# Altium PCB PCB1.PcbDoc (part 5 of 8)
Units mil, origin at the board's own origin, x right, y up, seen from the top; angles counter-clockwise.
Board outline 6000 x 4000 mil, 2 copper layers (Top Layer, Bottom Layer); 1253 components, 565 nets, 6549 pads, 0 vias.
Unrouted connection lines stored in the file: 1925.
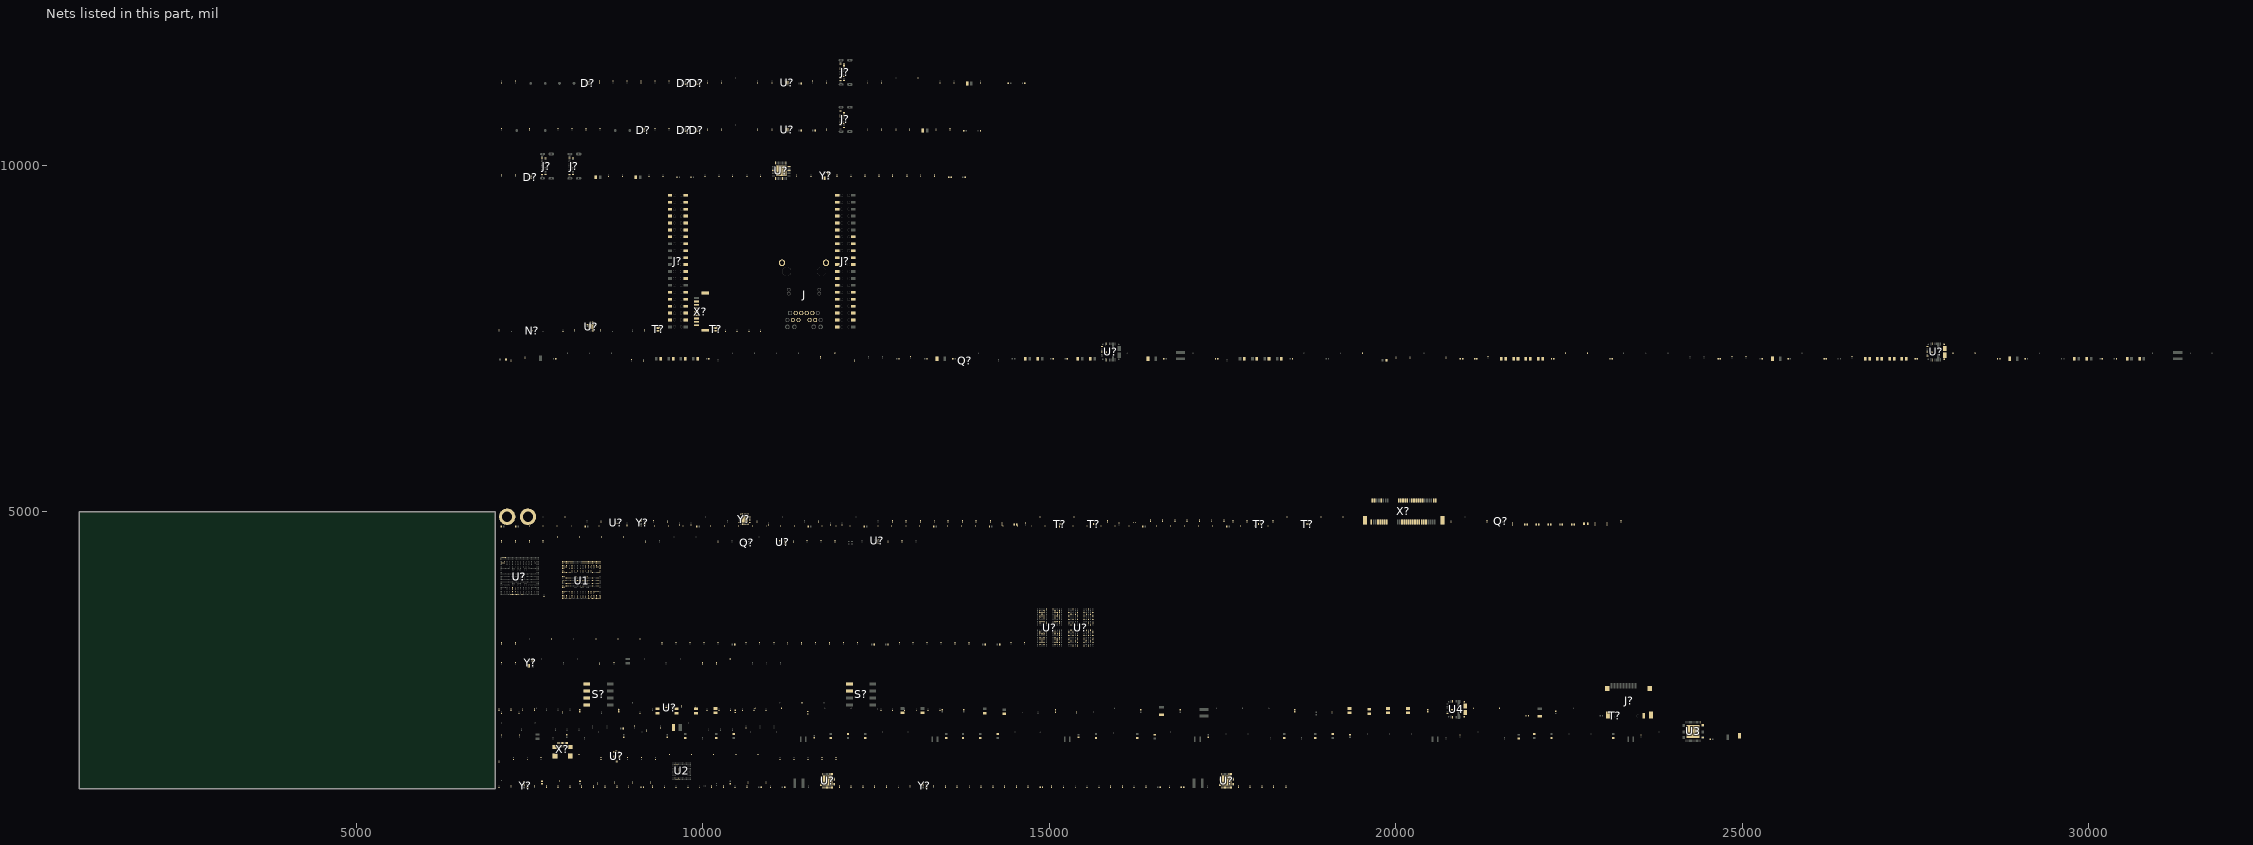
[diagram p4: the nets of this part, all layers, seen from the top]

## Part data (continued)
L10 L? L? L? L?: library part CMP-001-001158-1, "IND, Low DCR, shielded.", Manufacturer=Coilcraft, Manufacturer Part Number=XGL4030-102MEC, Operating temperature range="-40 ... +125 °C", Package=4030, ClassName=BIG, Component Type=Inductor, ComponentLink1Description=1_Datasheet, ComponentLink1URL=https://www.coilcraft.com/en-us/products/power/shielded-inductors/molded-inductor/xgl/xgl4030/xgl4030-102/, ComponentLink2Description=2_Product_page, ComponentLink2URL=https://www.coilcraft.com/en-us/products/power/shielded-inductors/molded-inductor/xgl/xgl4030/, ComponentLink3Description=3_X-information, ComponentLink4Description=4_X-information, Creation date=20250415, Dimensions WxLxH="4.3 x 4.3 x 3.1mm", Part Number=XGL4030-102MEC, Sort order=348, System=RLC
L? L? L? L? L? L? L? L? L? L? L? L?: library part CMP-001-000747-7, "FERRITE", Manufacturer=Murata, Manufacturer Part Number=BLF03JD421GZE, Operating temperature range="-55 ... +125C", Package=0201, Tolerance=25%, ClassName=SMALL, Component Type=Ferrite, ComponentLink1Description=1_Datasheet, ComponentLink2Description="2_Product page", ComponentLink3Description=3_X-information, ComponentLink4Description=4_X-information, Creation date=20200304, HasBeenBuilt=False, Part Number=BLF03JD421GZE, Sort order=362, Source=Discrete_UN1Q.SchLib, System=Discrete
L? L? L? L? L? L? L? L? L? L? L? L? L? L?: library part CMP-001-000744-7, "FERRITE", Manufacturer=Murata, Manufacturer Part Number=BLM03PG330SN1, Operating temperature range="-55 ... +125C", Package=0201, Tolerance=25%, ClassName=SMALL, Component Type=Ferrite, ComponentLink1Description=1_Datasheet, ComponentLink1URL=https://www.murata.com/en-us/products/productdetail.aspx?cate=luNoiseSupprFilteChipFerriBead&partno=BLM03PG330SN1%23, ComponentLink2Description="2_Product page", ComponentLink3Description=3_X-information, ComponentLink4Description=4_X-information, Creation date=20200304, HasBeenBuilt=TBD, Part Number=BLM03PG330SN1, Sort order=362, Source=Discrete_UN1Q.SchLib, System=Discrete
L? L? L? L?: library part CMP-001-001617-1, "IND, Low DCR, shielded.", Manufacturer=Wurth, Manufacturer Part Number=74439334047, Operating temperature range="-55°C ~ 150°C", Package=353220, Part Number=74479335329222, ClassName=BIG, Component Type=Inductor, ComponentLink1Description=1_Datasheet, ComponentLink1URL=https://www.we-online.com/components/products/datasheet/74479335329222.pdf, ComponentLink2Description=2_Product_page, ComponentLink2URL=https://www.we-online.com/en/components/products/WE-PMFI#74479335329222, ComponentLink3Description=3_X-information, ComponentLink4Description=4_X-information, Creation date=20251029, Dimensions WxLxH="3.5 x 3.2 x 2.0mm", Sort order=348, System=RLC
L? L? L? L? L? L? L? L? L? L? L? L? L? L?: library part CMP-001-000744-8, "FERRITE", Current=750mA, Manufacturer=Murata, Manufacturer Part Number=BLM03PG330SN1D, Operating temperature range="-55 ... +125C", Package=0201, Part Number=BLM03PG330SN1, Tolerance=25%, ClassName=SMALL, Component Type=Ferrite, ComponentLink1Description=1_Datasheet, ComponentLink1URL=https://www.murata.com/en-us/products/productdetail.aspx?cate=luNoiseSupprFilteChipFerriBead&partno=BLM03PG330SN1%23, ComponentLink2Description="2_Product page", ComponentLink3Description=3_X-information, ComponentLink4Description=4_X-information, Creation date=20200304, HasBeenBuilt=TBD, Sort order=362, Source=Discrete_UN1Q.SchLib, System=Discrete
L? L?: library part CMP-001-000747-7, "FERRITE", Manufacturer=Murata, Manufacturer Part Number=BLF03JD421GZED, Operating temperature range="-55 ... +125C", Package=0201, Part Number=BLF03JD421GZE, Tolerance=25%, ClassName=SMALL, Component Type=Ferrite, ComponentLink1Description=1_Datasheet, ComponentLink2Description="2_Product page", ComponentLink3Description=3_X-information, ComponentLink4Description=4_X-information, Creation date=20200304, HasBeenBuilt=False, Sort order=362, Source=Discrete_UN1Q.SchLib, System=Discrete
L? L?: library part CMP-001-000740-8, "FERRITE", Current=6A, Manufacturer=Murata, Manufacturer Part Number=BLM18KG260TN1D, Operating temperature range="-55 ... +125C", Package=0603, Part Number=BLM18KG260TN1, Component Type=Ferrite, ComponentLink1Description=1_Datasheet, ComponentLink1URL=https://www.murata.com/products/productdata/8796738650142/ENFA0003.pdf, ComponentLink2Description="2_Product page", ComponentLink3Description=3_X-information, ComponentLink4Description=4_X-information, Creation date=20200304, Dimensions WxLxH=0.8mm, Sort order=366, System=Discrete
M? M? M? M?: library part CMP-012-000004-10, "Standoff 2.7 mm M2.5 Hole 3.7 mm", Manufacturer=WURTH, Manufacturer Part Number=9774027151R, Component Type=Standoff, ComponentLink1Description=1_Datasheet, ComponentLink1URL=https://www.we-online.com/components/products/datasheet/9774027151R.pdf, ComponentLink2Description="2_Product page", ComponentLink2URL=https://www.we-online.com/catalog/en/SMSI_SMT_STEEL_SPACER_M2_5_THREAD_INTERNAL, ComponentLink3Description=3_X-information, ComponentLink4Description=4_X-information, Creation date=20230621, Design Item ID=Standoff_2_7mm_M25_WURTH, Dimensions WxLxH="M2.5 5.1x4.0mm", ECCN=EAR99, HasBeenBuilt=Saluki3, Part Number=9774027151R, RoHS="RoHS3 with ex", Sort order=101, Source=EMECH_UN1Q.SchLib, System=Standoff
N? N?: library part CMP-001-001548-1, "I2C temperature sensor, X2SON-5", Manufacturer="Texas Instruments", Package=X2SON-5, ClassName=BIG, Component Type=Sensor, ComponentLink1Description=1_Datasheet, ComponentLink1URL=https://www.ti.com/lit/ds/symlink/tmp110.pdf, ComponentLink2Description="2_Product page", ComponentLink3Description=3_X-information, ComponentLink4Description=4_X-information, Creation date=20250911, Dimensions WxLxH="0.8 × 0.8 × 0.4mm", Manufacturer Part Number=TMP110DIDPWR, Part Number=TMP110DIDPWR, Sort order=445, System=IC
PTP1 PTP2 PTP3 PTP4 PTP5 PTP6 PTP7 PTP8 PTP9 PTP10 PTP11 PTP12 PTP13 PTP14 PTP15 PTP16 PTP17 PTP18 PTP19 PTP22 PTP23 PTP24 PTP25 PTP26 PTP27 PTP28 PTP29 PTP30 PTP31 PTP32 PTP33 PTP34 PTP35 PTP36 PTP? PTP? PTP? PTP? PTP? PTP? PTP? PTP? PTP? PTP? PTP? PTP? PTP? PTP? PTP? PTP? PTP? PTP? PTP? PTP? PTP? PTP? PTP? PTP? PTP? PTP? PTP? PTP? PTP? PTP? PTP? PTP? PTP? PTP? PTP? PTP? PTP? PTP? PTP? PTP? PTP? PTP? PTP? PTP? PTP? PTP? PTP? PTP? PTP? PTP? PTP? PTP? PTP? PTP? PTP? PTP? PTP? PTP? PTP? PTP? PTP? PTP? PTP? PTP? PTP? PTP? PTP? PTP? PTP? PTP? PTP? PTP? PTP? PTP? PTP? PTP? PTP? PTP? PTP? PTP? PTP? PTP? PTP? PTP? PTP? PTP? PTP? PTP? PTP? PTP? PTP? PTP? PTP? PTP? PTP? PTP? PTP? PTP? PTP? PTP? PTP? PTP? PTP? PTP? PTP? PTP? PTP? PTP? PTP? PTP? PTP? PTP? PTP? PTP? PTP? PTP? PTP? PTP? PTP? PTP? PTP? PTP? PTP? PTP? PTP? PTP? PTP? PTP? PTP? PTP? PTP? PTP? PTP? PTP? PTP? PTP? PTP? PTP? PTP? PTP? PTP? PTP? PTP? PTP? PTP? PTP? PTP? PTP? PTP? PTP? PTP? PTP?: library part CMP-001-001296-3, "Production Testpoint 0.4mm. Flying probe. Use 1mm pitch.", Part Number="PTP 0.4mm", ClassName=SMALL, Component Type="Test Point", ComponentLink1Description=1_Datasheet, ComponentLink2Description="2_Product page", ComponentLink3Description=3_X-information, ComponentLink4Description=4_X-information, Creation date=20240909, Design Item ID=PTP_0.4mm, HasBeenBuilt=-, Sort order=-, System="Test Point"
Q? Q? Q? Q?: library part CMP-031-000021-4, "Dual Nch + Pch MOSFET 20V 200mA", Manufacturer=ROHM, Operating temperature range="-55 ... +155 °C", Package="SOT-563, SOT-666", ClassName=BIG, Component Type=Transistor, ComponentLink1Description=1_Datasheet, ComponentLink1URL=https://fscdn.rohm.com/en/products/databook/datasheet/discrete/transistor/mosfet/em6m2t2r-e.pdf, ComponentLink2Description="2_Product page", ComponentLink3Description=3_X-information, ComponentLink4Description=4_X-information, Creation date=20230614, Dimensions WxLxH="1.6 x 1.6 x 0.5mm", HasBeenBuilt=CCB30_1, Manufacturer Part Number=EM6M2T2R, Part Number=EM6M2T2R, Remark="MFG package EMT6", Sort order=501, Source=UUDET_KOMPONENTIT.SchLib, System=IC
Q? Q?: library part CMP-001-001632-2, "NMOS Transistor, 30V, 1.5A, 260mOhm", Manufacturer=TI, Operating temperature range="-55 ... +150 °C", Package="3-XFDFN, 3-PICOSTAR", ClassName=SMALL, Component Type=Transistor, ComponentLink1Description=1_Datasheet, ComponentLink1URL=https://www.ti.com/lit/ds/symlink/csd17483f4.pdf?ts=1762205176105, ComponentLink2Description="2_Product page", ComponentLink2URL=https://www.ti.com/product/CSD17483F4?keyMatch=CSD17483F4&tisearch=universal_search, ComponentLink3Description=3_X-information, ComponentLink4Description=4_X-information, Creation date=20251104, Dimensions WxLxH="1.0 × 0.6 × 0.36 mm", Manufacturer Part Number=CSD17483F4, Part Number=CSD17483F4, Sort order=447, System=Discrete
Q? Q?: library part CMP-031-000024-4, "NMOS Transistor, 30V", Manufacturer=Nexperia, Operating temperature range="-55 ... +150 °C", Package=DFN1006-3(SOT883), ClassName=SMALL, Component Type=Transistor, ComponentLink1Description=1_Datasheet, ComponentLink1URL=https://assets.nexperia.com/documents/data-sheet/PMZ390UNE.pdf, ComponentLink2Description="2_Product page", ComponentLink3Description=3_X-information, ComponentLink4Description=4_X-information, Creation date=20230913, Dimensions WxLxH="1.0 × 0.6 × 0.48 mm", HasBeenBuilt=CCB30_1, Manufacturer Part Number=PMZ390UNE, Part Number=PMZ390UNE, Sort order=447, Source=UUDET_KOMPONENTIT.SchLib, System=Discrete
QZ1 QZ? QZ?: library part CMP-001-000697-8, "SMT Quartz Crystal", Manufacturer="Micro Crystal", Manufacturer Part Number=CM8V-T1A-32.768KHZ-9PF-20PPM-TA-QC, Operating temperature range="-40 .... +85 °C", Package=2-SMD, ClassName=BIG, Component Type="Crystal & Oscillator", ComponentLink1Description=1_Datasheet, ComponentLink1URL=https://www.microcrystal.com/fileadmin/Media/Products/32kHz/Datasheet/CM8V-T1A.pdf, ComponentLink2Description="2_Product page", ComponentLink2URL=https://www.microcrystal.com/en/products/khz-quartz-crystals/cm8v-t1a/, ComponentLink3Description=3_X-information, ComponentLink4Description=4_X-information, Creation date=20210913, Dimensions WxLxH=1.2x2.0x0.6mm, HasBeenBuilt=SleeveIO_01, Part Number=CM8V-T1A-32.768KHZ-9PF-20PPM-TA-QC, Sort order=455, Source=Discrete_UN1Q.SchLib, System=Discrete
R1 R2 R3 R5 R9 R? R? R? R? R? R? R? R? R? R? R? R? R? R? R? R? R? R? R? R? R? R? R? R? R? R? R? R?: library part CMP-001-000434-10, "Not Assembled - RES", Package=0201, ClassName=SMALL, Component Type=Resistor, ComponentLink1Description=1_Datasheet, ComponentLink2Description="2_Product page", ComponentLink3Description=3_X-information, ComponentLink4Description=4_X-information, Creation date=20190101, HasBeenBuilt=TBD, Sort order=999, Source=RLC_UN1Q.SchLib, System=RLC
R4 R6 R? R? R? R?: library part CMP-001-000429-13, "RES", Manufacturer=YAGEO, Package=0201, Part Number=RC0201JR-070RL, Power Rating=1/20W, Tolerance=5%, Alternative component=Allowed, ClassName=SMALL, Component Type=Resistor, ComponentLink1Description=1_Datasheet, ComponentLink2Description="2_Product page", ComponentLink3Description=3_X-information, ComponentLink4Description=4_X-information, Creation date=20190101, HasBeenBuilt=TBD, Sort order=322, Source=RLC_UN1Q.SchLib, System=RLC
R7 R8 R11 R12 R15 R? R? R? R? R? R? R? R? R? R? R? R? R? R? R? R? R? R? R? R? R? R? R? R? R? R? R? R? R? R? R? R? R? R?: library part CMP-001-000526-11, "RES", Manufacturer=YAGEO, Package=0201, Part Number=RC0201FR-07100KL, Power Rating=1/20W, Tolerance=1%, Alternative component=Allowed, ClassName=SMALL, Component Type=Resistor, ComponentLink1Description=1_Datasheet, ComponentLink2Description="2_Product page", ComponentLink3Description=3_X-information, ComponentLink4Description=4_X-information, Creation date=20190101, HasBeenBuilt=TBD, Sort order=322, Source=RLC_UN1Q.SchLib, System=RLC
R10 R? R?: library part CMP-001-001154-3, "RES", Manufacturer=YAGEO, Package=0201, Part Number=RC0201FR-0752K3L, Power Rating=1/20W, Tolerance=1%, Alternative component=Allowed, ClassName=SMALL, Component Type=Resistor, ComponentLink1Description=1_Datasheet, ComponentLink2Description="2_Product page", ComponentLink3Description=3_X-information, ComponentLink4Description=4_X-information, Creation date=20250716, HasBeenBuilt=TBD, Sort order=322, System=RLC
R13 R? R?: library part CMP-001-001155-2, "RES", Manufacturer=YAGEO, Package=0201, Part Number=RC0201FR-079K76L, Power Rating=1/20W, Tolerance=1%, Alternative component=Allowed, ClassName=SMALL, Component Type=Resistor, ComponentLink1Description=1_Datasheet, ComponentLink2Description="2_Product page", ComponentLink3Description=3_X-information, ComponentLink4Description=4_X-information, Creation date=20250415, HasBeenBuilt=TBD, Sort order=322, System=RLC
R14: library part CMP-001-001153-3, "RES", Manufacturer=YAGEO, Package=0201, Part Number=RC0201FR-0731K6L, Power Rating=1/20W, Tolerance=1%, Alternative component=Allowed, ClassName=SMALL, Component Type=Resistor, ComponentLink1Description=1_Datasheet, ComponentLink2Description="2_Product page", ComponentLink3Description=3_X-information, ComponentLink4Description=4_X-information, Creation date=20250414, HasBeenBuilt=TBD, Sort order=322, System=RLC
R16 R? R? R? R? R? R? R? R? R? R? R? R? R? R? R? R? R? R? R? R? R? R? R? R? R? R? R? R? R? R? R? R? R? R? R? R? R? R? R? R? R? R?: library part CMP-001-000446-13, "RES", Manufacturer=YAGEO, Package=0201, Part Number=RC0201FR-0710KL, Power Rating=1/20W, Tolerance=1%, Alternative component=Allowed, ClassName=SMALL, Component Type=Resistor, ComponentLink1Description=1_Datasheet, ComponentLink2Description="2_Product page", ComponentLink3Description=3_X-information, ComponentLink4Description=4_X-information, Creation date=20190101, HasBeenBuilt=TBD, Sort order=322, Source=RLC_UN1Q.SchLib, System=RLC
R17 R? R?: library part CMP-001-001157-2, "RES", Manufacturer=YAGEO, Package=0201, Part Number=RC0201FR-07121KL, Power Rating=1/20W, Tolerance=1%, Alternative component=Allowed, ClassName=SMALL, Component Type=Resistor, ComponentLink1Description=1_Datasheet, ComponentLink2Description="2_Product page", ComponentLink3Description=3_X-information, ComponentLink4Description=4_X-information, Creation date=20250415, HasBeenBuilt=TBD, Sort order=322, System=RLC
R18 R? R? R? R?: library part CMP-001-001156-2, "RES", Manufacturer=YAGEO, Package=0201, Part Number=RC0201FR-077K15L, Power Rating=1/20W, Tolerance=1%, Alternative component=Allowed, ClassName=SMALL, Component Type=Resistor, ComponentLink1Description=1_Datasheet, ComponentLink2Description="2_Product page", ComponentLink3Description=3_X-information, ComponentLink4Description=4_X-information, Creation date=20250415, HasBeenBuilt=TBD, Sort order=322, System=RLC
R? R? R? R? R? R? R? R? R? R? R? R? R? R? R? R? R? R? R? R? R? R? R? R? R? R? R? R? R? R? R? R? R? R? R? R? R? R?: library part CMP-001-000475-13, "RES", Manufacturer=YAGEO, Manufacturer Part Number=RC0201FR-074K7L, Package=0201, Power Rating=1/20W, Tolerance=1%, Alternative component=Allowed, ClassName=SMALL, Component Type=Resistor, ComponentLink1Description=1_Datasheet, ComponentLink2Description="2_Product page", ComponentLink3Description=3_X-information, ComponentLink4Description=4_X-information, Creation date=20190101, HasBeenBuilt=TBD, Part Number=RC0201FR-074K7L, Sort order=322, Source=RLC_UN1Q.SchLib, System=RLC
R? R? R? R? R? R? R? R?: library part CMP-001-000526-11, "RES", Manufacturer=YAGEO, Manufacturer Part Number=RC0201FR-07100KL, Package=0201, Power Rating=1/20W, Tolerance=1%, Alternative component=Allowed, ClassName=SMALL, Component Type=Resistor, ComponentLink1Description=1_Datasheet, ComponentLink2Description="2_Product page", ComponentLink3Description=3_X-information, ComponentLink4Description=4_X-information, Creation date=20190101, HasBeenBuilt=TBD, Part Number=RC0201FR-07100KL, Sort order=322, Source=RLC_UN1Q.SchLib, System=RLC
R? R? R? R? R? R? R? R?: library part CMP-001-001013-2, "RES", Manufacturer=YAGEO, Package=0201, Part Number=RC0201FR-072K26L, Power Rating=1/20W, Tolerance=1%, Alternative component=Allowed, ClassName=SMALL, Component Type=Resistor, ComponentLink1Description=1_Datasheet, ComponentLink2Description="2_Product page", ComponentLink3Description=3_X-information, ComponentLink4Description=4_X-information, Creation date=20250117, HasBeenBuilt=TBD, Sort order=322, Source=RLC_UN1Q.SchLib, System=RLC
R? R?: library part CMP-001-001254-9, "RES", Manufacturer="MULTICOMP PRO", Package=0201, Part Number=MCRE000254, Power Rating=1/20W, Tolerance=1%, Alternative component=Allowed, ClassName=SMALL, Component Type=Resistor, ComponentLink1Description=1_Datasheet, ComponentLink2Description="2_Product page", ComponentLink3Description=3_X-information, ComponentLink4Description=4_X-information, Creation date=20240404, Sort order=322, System=RLC
R? R?: library part CMP-001-000576-12, "RES", Manufacturer="Panasonic Electronic Components", Package=0201, Part Number=ERJ-1GNF5103C, Power Rating=1/20W, Tolerance=1%, Alternative component=Allowed, ClassName=SMALL, Component Type=Resistor, ComponentLink1Description=1_Datasheet, ComponentLink2Description="2_Product page", ComponentLink3Description=3_X-information, ComponentLink4Description=4_X-information, Creation date=20211123, HasBeenBuilt=TBD, Sort order=322, Source=RLC_UN1Q.SchLib, System=RLC
R? R? R? R?: library part CMP-001-000455-11, "RES", Manufacturer=YAGEO, Package=0201, Part Number=RC0201FR-071K5L, Power Rating=1/20W, Tolerance=1%, Alternative component=Allowed, ClassName=SMALL, Component Type=Resistor, ComponentLink1Description=1_Datasheet, ComponentLink2Description="2_Product page", ComponentLink3Description=3_X-information, ComponentLink4Description=4_X-information, Creation date=20190101, HasBeenBuilt=False, Sort order=322, Source=RLC_UN1Q.SchLib, System=RLC
R? R?: library part RES_0201_10k, "RES", Package=0201, Power Rating=1/20W, Tolerance=+/-1%, ClassName=SMALL, ComponentLink1Description=1_Datasheet, ComponentLink2Description=2_Product_page, ComponentLink3Description=3_X-information, ComponentLink4Description=4_X-information, Creation date=20190101, Desc2=resistance_10K_1%_1/20W, HasBeenBuilt=TBD, HasBeenChecked=None, Sort order=322, System=RLC
R? R?: library part CMP-001-001255-9, "RES", Manufacturer="Panasonic Electronic Components", Package=0201, Part Number=ERJ1GNF8201C, Power Rating=1/20W, Tolerance=1%, Alternative component=Allowed, ClassName=SMALL, Component Type=Resistor, ComponentLink1Description=1_Datasheet, ComponentLink2Description="2_Product page", ComponentLink3Description=3_X-information, ComponentLink4Description=4_X-information, Creation date=20240404, Sort order=322, System=RLC
R? R? R? R?: library part CMP-001-000561-13, "RES", Manufacturer=YAGEO, Package=0201, Part Number=RMCF0201FT2K49, Power Rating=1/20W, Tolerance=1%, Alternative component=Allowed, ClassName=SMALL, Component Type=Resistor, ComponentLink1Description=1_Datasheet, ComponentLink2Description="2_Product page", ComponentLink3Description=3_X-information, ComponentLink4Description=4_X-information, Creation date=20230510, HasBeenBuilt=TBD, Sort order=322, Source=RLC_UN1Q.SchLib, System=RLC
R? R? R? R? R? R? R? R? R? R? R? R? R? R? R? R?: library part CMP-001-000429-13, "RES", Manufacturer=YAGEO, Manufacturer Part Number=RC0201JR-070RL, Package=0201, Power Rating=1/20W, Tolerance=5%, Alternative component=Allowed, ClassName=SMALL, Component Type=Resistor, ComponentLink1Description=1_Datasheet, ComponentLink2Description="2_Product page", ComponentLink3Description=3_X-information, ComponentLink4Description=4_X-information, Creation date=20190101, HasBeenBuilt=TBD, Part Number=RC0201JR-070RL, Sort order=322, Source=RLC_UN1Q.SchLib, System=RLC
R? R?: library part CMP-001-000450-13, "RES", Manufacturer=YAGEO, Package=0201, Part Number=RC0201FR-0712KL, Power Rating=1/20W, Tolerance=1%, Alternative component=Allowed, ClassName=SMALL, Component Type=Resistor, ComponentLink1Description=1_Datasheet, ComponentLink2Description="2_Product page", ComponentLink3Description=3_X-information, ComponentLink4Description=4_X-information, Creation date=20190101, HasBeenBuilt=TBD, Sort order=322, Source=RLC_UN1Q.SchLib, System=RLC
R? R?: library part CMP-001-001257-9, "RES", Manufacturer=YAGEO, Package=0201, Part Number=RC0201FR-0740K2L, Power Rating=1/20W, Tolerance=1%, Alternative component=Allowed, ClassName=SMALL, Component Type=Resistor, ComponentLink1Description=1_Datasheet, ComponentLink2Description="2_Product page", ComponentLink3Description=3_X-information, ComponentLink4Description=4_X-information, Creation date=20240404, Sort order=322, System=RLC
R? R?: library part CMP-001-001255-9, "RES", Manufacturer="Panasonic Electronic Components", Manufacturer Part Number=ERJ1GNF8201C, Package=0201, Power Rating=1/20W, Tolerance=1%, Alternative component=Allowed, ClassName=SMALL, Component Type=Resistor, ComponentLink1Description=1_Datasheet, ComponentLink2Description="2_Product page", ComponentLink3Description=3_X-information, ComponentLink4Description=4_X-information, Creation date=20240404, Part Number=ERJ1GNF8201C, Sort order=322, System=RLC
R? R?: library part CMP-001-000538-13, "RES", Manufacturer=YAGEO, Package=0201, Part Number=RC0201FR-07150KL, Power Rating=1/20W, Tolerance=1%, Alternative component=Allowed, ClassName=SMALL, Component Type=Resistor, ComponentLink1Description=1_Datasheet, ComponentLink2Description="2_Product page", ComponentLink3Description=3_X-information, ComponentLink4Description=4_X-information, Creation date=20211202, HasBeenBuilt=TBD, Sort order=322, System=RLC
R? R?: library part CMP-001-000543-12, "RES", Manufacturer=YAGEO, Package=0201, Part Number=RC0201FR-07180KL, Power Rating=1/20W, Tolerance=1%, Alternative component=Allowed, ClassName=SMALL, Component Type=Resistor, ComponentLink1Description=1_Datasheet, ComponentLink2Description="2_Product page", ComponentLink3Description=3_X-information, ComponentLink4Description=4_X-information, Creation date=20190101, HasBeenBuilt=TBD, Sort order=322, System=RLC
R? R?: library part CMP-001-001160-1, "RES", Manufacturer=YAGEO, Package=0201, Part Number=RC0201FR-0742K2L, Power Rating=1/20W, Tolerance=1%, Alternative component=Allowed, ClassName=SMALL, Component Type=Resistor, ComponentLink1Description=1_Datasheet, ComponentLink2Description="2_Product page", ComponentLink3Description=3_X-information, ComponentLink4Description=4_X-information, Creation date=20250415, Sort order=322, System=RLC
R? R?: library part CMP-001-000449-12, "RES", Manufacturer=YAGEO, Package=0201, Part Number=RC0201FR-0711KL, Power Rating=1/20W, Tolerance=1%, Alternative component=Allowed, ClassName=SMALL, Component Type=Resistor, ComponentLink1Description=1_Datasheet, ComponentLink2Description="2_Product page", ComponentLink3Description=3_X-information, ComponentLink4Description=4_X-information, Creation date=20190101, HasBeenBuilt=TBD, Sort order=322, System=RLC
R? R?: library part CMP-001-000535-12, "RES", Manufacturer=YAGEO, Package=0201, Part Number=RC0201FR-0712K4L, Power Rating=1/20W, Tolerance=1%, Alternative component=Allowed, ClassName=SMALL, Component Type=Resistor, ComponentLink1Description=1_Datasheet, ComponentLink2Description="2_Product page", ComponentLink3Description=3_X-information, ComponentLink4Description=4_X-information, Creation date=20230510, HasBeenBuilt=TBD, Sort order=322, Source=RLC_UN1Q.SchLib, System=RLC
R? R?: library part CMP-001-001161-1, "RES", Manufacturer=YAGEO, Package=0201, Part Number=RC0201FR-0713K3L, Power Rating=1/20W, Tolerance=1%, Alternative component=Allowed, ClassName=SMALL, Component Type=Resistor, ComponentLink1Description=1_Datasheet, ComponentLink2Description="2_Product page", ComponentLink3Description=3_X-information, ComponentLink4Description=4_X-information, Creation date=20250415, HasBeenBuilt=TBD, Sort order=322, System=RLC
R? R?: library part CMP-001-001496-1, "RES", Manufacturer="Vishay Dale", Package=0201, Part Number=CRCW020156K2FNED, Power Rating=1/20W, Tolerance=1%, Alternative component=Allowed, ClassName=SMALL, Component Type=Resistor, ComponentLink1Description=1_Datasheet, ComponentLink2Description="2_Product page", ComponentLink3Description=3_X-information, ComponentLink4Description=4_X-information, Creation date=20250813, HasBeenBuilt=TBD, Sort order=322, Source=RLC_UN1Q.SchLib, System=RLC
S? S? S? S?: "Dip Switch SPST 4 Position Surface Mount Slide (Standard) Actuator 100mA 20VDC", Package=None, Check_prices=https://www.snapeda.com/parts/219-4MST/CTS+Components/view-part/?ref=eda, MF="CTS Electrocomponents", MP=219-4MST, SnapEDA_Link=https://www.snapeda.com/parts/219-4MST/CTS+Components/view-part/?ref=snap
T? T? T? T? T? T? T? T? T? T? T? T? T? T? T? T? T? T? T? T?: library part CMP-001-001100-1, "ESD Protection  TVS Diodes SMP Diode 0201 5vdc 2.5pf <12v clamp@1a", Manufacturer="KYOCERA AVX", Manufacturer Part Number=GG0201052R542P, Operating temperature range="-55 ... +125C", Package=0201, Voltage=5.0V, ClassName=SMALL, Component Type="ESD & EMI", ComponentLink1Description=1_Datasheet, ComponentLink1URL=https://datasheets.kyocera-avx.com/AVX-GiGuard.pdf, ComponentLink2Description="2_Product page", ComponentLink3Description=3_X-information, ComponentLink4Description=4_X-information, Creation date=20250310, Part Number=GG0201052R542P, Sort order=402, System=Discrete
T? T? T? T? T? T? T? T?: library part CMP-001-000968-3, "EMI Filter 90Ω 100MHz 100mA 5V", Manufacturer=Murata, Manufacturer Part Number=DLM0NSM900HY2D, Operating temperature range="-40 ... +85 °C", Package=0.85x0.65x0.50, Component Type="ESD & EMI", ComponentLink1Description=1_Datasheet, ComponentLink1URL=https://www.murata.com/en-us/api/pdfdownloadapi?cate=cgsubChipCommoModeChokeCoil&partno=DLM0NSM900HY2%23, ComponentLink2Description="2_Product page", ComponentLink2URL=https://www.murata.com/products/productdetail?partno=DLM0NSM900HY2%23, ComponentLink3Description=3_X-information, ComponentLink4Description=4_X-information, Creation date=20230103, Dimensions WxLxH=0.85x0.65x0.50, HasBeenBuilt=Cmod2_01, Part Number=DLM0NSM900HY2D, Sort order=441, Source=UUDET_KOMPONENTIT.SchLib, System=Discrete
T? T?: library part CMP-001-001100-2, "ESD Protection  TVS Diodes SMP Diode 0201 5vdc 2.5pf <12v clamp@1a", Manufacturer="KYOCERA AVX", Manufacturer Part Number=GG0201052R542P, Operating temperature range="-55 ... +125C", Package=0201, Voltage=5.0V, ClassName=SMALL, Component Type="ESD & EMI", ComponentLink1Description=1_Datasheet, ComponentLink1URL=https://datasheets.kyocera-avx.com/AVX-GiGuard.pdf, ComponentLink2Description="2_Product page", ComponentLink3Description=3_X-information, ComponentLink4Description=4_X-information, Creation date=20250310, Part Number=GG0201052R542P, Sort order=402, System=Discrete
T? T? T? T? T? T? T? T?: library part CMP-001-000756-6, "ESD Protection  TVS Diodes SMP Diode 0201 5vdc 10 pf <8v clamp@1a", Manufacturer=TDK, Manufacturer Part Number=GG020105100N2P, Operating temperature range="-40 ... +85C", Package=0201, Voltage=5.5V, ClassName=SMALL, Component Type="ESD & EMI", ComponentLink1Description=1_Datasheet, ComponentLink1URL=https://www2.mouser.com/datasheet/2/40/AVX_GiGuard-1101674.pdf, ComponentLink2Description="2_Product page", ComponentLink3Description=3_X-information, ComponentLink4Description=4_X-information, Creation date=20211207, Dimensions WxLxH=tbd, HasBeenBuilt=TBD, Part Number=GG020105100N2P, Sort order=402, Source=Discrete_UN1Q.SchLib, System=Discrete
T? T? T? T?: library part CMP-001-001620-1, "EMI Filter with ESD, 2x differential pair", Manufacturer=STMicroelectronics, Manufacturer Part Number=ECMF4-2450A60N10, Operating temperature range="-55°C ~ 125°C", Package=10-XFDFN, Component Type="ESD & EMI", ComponentLink1Description=1_Datasheet, ComponentLink1URL=https://www.st.com/resource/en/datasheet/ecmf4-2450a60n10.pdf, ComponentLink2Description="2_Product page", ComponentLink2URL=https://www.st.com/en/protections-and-emi-filters/common-mode-filters-with-integrated-esd-protection-ecmf.html, ComponentLink3Description=3_X-information, ComponentLink4Description=4_X-information, Creation date=20251103, Dimensions WxLxH="2.20 x 1.35 x 0.50mm", Part Number=ECMF4-2450A60N10, Sort order=441, System=Discrete
T? T?: library part CMP-001-000966-8, "450 W bidirectional TVS diode, 36 V / 60 V", Manufacturer=Littelfuse, Manufacturer Part Number=SD36C-01FTG, Operating temperature range="-40 .... +125 °C (Note: derating)", Package=SOD323, Voltage=60V, ClassName=SMALL, Component Type="ESD & EMI", ComponentLink1Description=1_Datasheet, ComponentLink1URL=https://www.littelfuse.com/assetdocs/tvs-diode-array-spa-sd-c-datasheet?assetguid=b682d4fa-3733-4cd6-9f7f-7cf1a490030b, ComponentLink2Description="2_Product page", ComponentLink2URL=https://www.littelfuse.com/products/tvs-diode-arrays/general-purpose-esd-protection/sdc/sd36c_01ftg.aspx, ComponentLink3Description=3_X-information, ComponentLink4Description=4_X-information, Creation date=20230529, Dimensions WxLxH="1.45 x 1.90 x 1.14 mm", ECCN=EAR99, HasBeenBuilt=Saluki3_HW_SB_2, Part Number=SD36C-01FTG, RoHS=RoHS3, Sort order=402, Source=UUDET_KOMPONENTIT.SchLib, System=IC
T?: library part CMP-001-000967-4, "EMI Filter with ESD 15kV differential pair", Manufacturer=Nexperia, Manufacturer Part Number=PCMF1USB3SZ, Operating temperature range="-40 ... +125 °C", Package=WLCSP5, Component Type="ESD & EMI", ComponentLink1Description=1_Datasheet, ComponentLink1URL=https://assets.nexperia.com/documents/data-sheet/PCMFXUSB3S_SER.pdf, ComponentLink2Description="2_Product page", ComponentLink2URL=https://www.nexperia.com/search?searchCategory=&q=PCMF1USB3SZ, ComponentLink3Description=3_X-information, ComponentLink4Description=4_X-information, Creation date=15042024, Dimensions WxLxH="1.17 x 0.77 x 0.60mm", Part Number=PCMF1USB3SZ, Sort order=441, Source=UUDET_KOMPONENTIT.SchLib, System=Discrete
U1 U? U?: library part CMP-001-000983-8, "CPU QUAD CORTEX A53+M4 1.6GHZ BGA548 Industrial", Manufacturer="NXP SEMICONDUCTORS", Operating temperature range="-40... +105 °C", Package=FCBGA548, ClassName=BIG, Component Type=Processor, ComponentLink1Description=1_Datasheet, ComponentLink1URL=https://www.nxp.com/part/MIMX8ML8CVNKZAB#/, ComponentLink2Description="2_Product page", ComponentLink3Description=3_X-information, ComponentLink4Description=4_X-information, Creation date=20240524, Design Item ID=MIMX8ML8CVNKZAB, Dimensions WxLxH="15 x 15 x 1.33mm", Manufacturer Part Number=MIMX8ML8CVNKZAB, Part Number=MIMX8ML8CVNKZAB, Sort order=501, Source=UUDET_KOMPONENTIT.SchLib, System=IC
U2: library part CMP-001-001175-2, "MEM NAND FLASH 512GB eMMC 5.1 HS400 2.7-3.6V, 1.8V VCCQ, TFBGA153 Ferri-eMMC Automotive", Manufacturer="Silicon Motion, Inc.", Manufacturer Part Number=SM662PBFBFSS, Operating temperature range="-40 .... +105 °C", Package=TFBGA-153, Component Type=Memory, ComponentLink1Description=1_Datasheet, ComponentLink2Description="2_Product page", ComponentLink2URL=https://www.siliconmotion.com/products/Ferri-eMMC/detail, ComponentLink3Description="3_Product brief", ComponentLink3URL=https://www.siliconmotion.com/download/DWo5/a/Ferri-eMMC_PB_EN.pdf, ComponentLink4Description=4_X-information, Creation date=20250508, Dimensions WxLxH="11.5 x 13 x 1.2 mm", Part Number="SM662PBF BFS", Sort order=511, System=IC
U3: library part CMP-031-000204-7, "POWER MANAGEMENT 2.7-5.5V HVQFN56", Manufacturer="NXP SEMICONDUCTORS", Manufacturer Part Number=PCA9450CHN, Operating temperature range="-40 .... +105 °C", Package=QFN56, ClassName=BIG, Component Type="Power Supply", ComponentLink1Description=1_Datasheet, ComponentLink1URL=https://www.nxp.com/products/power-management/pmics-and-sbcs/pmics/power-management-ic-pmic-for-i-mx-8m-mini-nano-plus:PCA9450, ComponentLink2Description="2_Product page", ComponentLink3Description=3_X-information, ComponentLink4Description=4_X-information, Creation date=20240207, Design Item ID=PCA9450CHN, Dimensions WxLxH=7.0x7.0x1.0, Part Number=PCA9450CHN, Sort order=451, Source=UUDET_KOMPONENTIT.SchLib, System=IC
U4 U? U? U? U?: library part CMP-001-001142-13, "SMPS Module,  3V to 36V Input, 0.8V to 16V Dual Output, 3A+3A", Manufacturer="Texas Instruments", Operating temperature range="-40C ... +125C", Package=QFN-FCMOD-28, ClassName=BIG, Component Type="Power Supply", ComponentLink1Description=1_Datasheet, ComponentLink1URL=https://www.ti.com/lit/ds/symlink/tpsm64406.pdf?ts=1704232235164&ref_url=https%253A%252F%252Fwww.ti.com%252Fproduct%252FTPSM64406, ComponentLink2Description="2_Product page", ComponentLink2URL=https://www.ti.com/product/TPSM64406?keyMatch=tpsm64406&tisearch=universal_search#design-development, ComponentLink3Description=3_Package, ComponentLink3URL=https://www.ti.com/lit/ml/mpqf746/mpqf746.pdf?ts=1744029691982&ref_url=https%253A%252F%252Fwww.ti.com%252Fproduct%252FTPSM64406%253FkeyMatch%253Dtpsm64406%2526tisearch%253Duniversal_search, ComponentLink4Description=4_X-information, Creation date=20250407, Design Item ID=TPSM63602RDHR, Dimensions WxLxH=6.6x7.2x2.1mm, ECCN=EAR99, Manufacturer Part Number=TPSM64406RCHR, Part Number=TPSM64406RCHR, RoHS="RoHS 3", Sort order=453, System=IC
U? U? U? U?: library part CMP-001-001446-1, "MEM LPDDR4 SDRAM 2133MHz 2Gx32Gb 1.1V", Manufacturer=Micron, Operating temperature range="-40 .... +105 °C", Package=TFBGA-200, ClassName=BIG, Component Type=Memory, ComponentLink1Description=1_Datasheet, ComponentLink1URL=https://www.micron.com/products/memory/dram-components/lpddr4/part-catalog/part-detail/mt53e2g32d4de-046-aat-c#login-modal, ComponentLink2Description="2_Product page", ComponentLink2URL=https://www.micron.com/products/memory/dram-components/lpddr4/part-catalog/part-detail/mt53e2g32d4de-046-aat-c, ComponentLink3Description=3_X-information, ComponentLink4Description=4_X-information, Creation date=20250619, Design Item ID="MT53E2G32D4DE-046 AAT:C", Dimensions WxLxH=10x14.5x1.2mm, ECCN=EAR99, Manufacturer Part Number="MT53E2G32D4DE-046 AAT:C", Part Number="MT53E2G32D4DE-046 AAT:C", Sort order=511, System=IC
U? U?: library part CMP-031-000208-3, "I/O Expander 16-Bit I²C, SMBus, 0.5mm pitch", Manufacturer=NXP, Manufacturer Part Number=PCAL6416AEVJ, Operating temperature range="-40 .... +85 °C", Package=VFBGA24, Component Type="Integrated Circuit", ComponentLink1Description=1_Datasheet, ComponentLink1URL=https://www.nxp.com/docs/en/data-sheet/PCAL6416A.pdf, ComponentLink2Description="2_Product page", ComponentLink3Description=3_Product_page, ComponentLink4Description=4_X-information, Creation date=21122023, Design Item ID=PCAL6416AEVJ_VFBGA24, Dimensions WxLxH="3.0 x 3.0 x  1.0mm", ECCN=EAR99, HasBeenBuilt=Saluki3S_1, Part Number=PCAL6416AEVJ, RoHS=RoHS3, Sort order=501, Source=UUDET_KOMPONENTIT.SchLib, System=IC
U? U?: library part CMP-031-000171-3, "High speed, Open-Drain capable logic level translator. Pin compatible with MAX14591ETA.", Manufacturer="Maxim Integrated", Operating temperature range="-40 ... +85 °C", Package=TDFN8, ClassName=BIG, Component Type="Integrated Circuit", ComponentLink1Description=1_Datasheet, ComponentLink1URL=https://datasheets.maximintegrated.com/en/ds/MAX14595.pdf, ComponentLink2Description="2_Product page", ComponentLink2URL=https://www.maximintegrated.com/en/products/interface/level-translators/MAX14595.html, ComponentLink3Description=3_X-information, ComponentLink3URL=https://pdfserv.maximintegrated.com/land_patterns/90-0349.PDF, ComponentLink4Description=4_X-information, Creation date=20221104, Design Item ID=MAX14595ETA_T, Dimensions WxLxH="2x2x0.8 mm", HasBeenBuilt=Cmod2_01, Manufacturer Part Number=MAX14595ETA+T, Part Number=MAX14595ETA+T, Sort order=501, Source=UUDET_KOMPONENTIT.SchLib, System=IC
U? U? U? U?: library part CMP-031-000173-6, "Ethernet PHY, RGMII, 1000BASE-T, 100BASE-TX, 10BASE-Te", Manufacturer=MaxLinear, Operating temperature range="-40 .... +85 °C", Package=QFN40, ClassName=BIG, Component Type="Data Converter", ComponentLink1Description=1_Datasheet, ComponentLink1URL=https://www.maxlinear.com/Document/index?id=23355&productId=14849, ComponentLink2Description=2_Product_page, ComponentLink2URL=https://www.maxlinear.com/product/interface/ethernet/ethernet-transceivers-phy/mxl86110, ComponentLink3Description=3_X-information, ComponentLink4Description=4_X-information, Creation date=26032024, Design Item ID=MXL86110I-AQB, Dimensions WxLxH=5x5x1mm, HasBeenBuilt=False, Manufacturer Part Number=MXL86110I-AQB, Part Number=MXL86110I-AQB, Sort order=501, Source=UUDET_KOMPONENTIT.SchLib, System=IC
U? U?: library part CMP-031-000038-2, "HDMI ESD Protection and I2C Level Shifting Buffer", Manufacturer="Texas Instruments", Manufacturer Part Number=TPD12S016RKTR, Operating temperature range="-40... +85 °C", Package=UQFN24, Component Type="ESD & EMI", ComponentLink1Description=1_Datasheet, ComponentLink1URL=https://www.ti.com/lit/ds/symlink/tpd12s016.pdf, ComponentLink2Description="2_Product page", ComponentLink2URL=https://www.ti.com/product/TPD12S016, ComponentLink3Description=3_X-information, ComponentLink4Description=4_X-information, Creation date=20230510, Design Item ID=TPD12S016RKT, Dimensions WxLxH=2.1x4.1x0.55, ECCN=EAR99, HasBeenBuilt=Saluki3_HW_RIB_2, Part Number=TPD12S016RKTR, RoHS=RoHS3, Sort order=405, Source=UUDET_KOMPONENTIT.SchLib, System=IC
U? U?: "Single-Bit Dual-Supply Bus Transceiver with Configurable Voltage-Level Shifting and 3-State Outputs", Package="SOT-SC70-6 Texas Instruments", Check_prices=https://www.snapeda.com/parts/SN74AVC1T45DCKR/Texas+Instruments/view-part/?ref=eda, MF="Texas Instruments", MP=SN74AVC1T45DCKR, SnapEDA_Link=https://www.snapeda.com/parts/SN74AVC1T45DCKR/Texas+Instruments/view-part/?ref=snap
U? U? U? U?: library part CMP-001-001164-4, "USB3.1 Gen1 Type-C Superspeed Active Signal Switch", Manufacturer=NXP, Manufacturer Part Number=1825J0100820FCT, Operating temperature range="-40C ... +85C", Package=DHX2QFN18, Component Type=Logic, ComponentLink1Description=1_Datasheet, ComponentLink1URL=https://www.nxp.com/docs/en/data-sheet/PTN36043B.pdf, ComponentLink2Description="2_Product page", ComponentLink3Description="3_EVA kit", ComponentLink3URL=https://www.nxp.com/design/design-center/development-boards-and-designs/analog-toolbox/ptn5150a-ptn36043-usb-type-c-cc-logic-evaluation-kit:OM13584, ComponentLink4Description=4_X-information, Creation date=20250417, Dimensions WxLxH="2.4 x 2.0 x 0.35mm", Part Number=PTN36043BBXY, Sort order=501, System=IC
U? U?: library part CMP-001-001197-8, "Non-inverting, Schmitt-Trigger, CMOS.", Manufacturer=Nexperia, Manufacturer Part Number=74LVC2G17GS,132, Operating temperature range="-40C ... +125C", Package=XSON6, Component Type=Logic, ComponentLink1Description=1_Datasheet, ComponentLink1URL=https://assets.nexperia.com/documents/data-sheet/74LVC2G17.pdf, ComponentLink2Description="2_Product page", ComponentLink2URL=https://www.nexperia.com/search?q=74LVC2G&searchCategory=product, ComponentLink3Description=3_X-information, ComponentLink4Description=4_X-information, Creation date=06032024, Dimensions WxLxH="1.0 mm x 1.0 mm x 0.35mm", Part Number=74LVC2G17GS, Sort order=446, System=IC
U? U?: library part CMP-076-000057-8, "USB 2.0 Hi-Speed Hub Controller", Manufacturer=Microchip, Manufacturer Part Number=USB2514Bi/M2, Operating temperature range="-40 ... +85 °C", Package=SQFN36, ClassName=BIG, Component Type="Data Converter", ComponentLink1Description=1_Datasheet, ComponentLink1URL=http://www.microchip.com/mymicrochip/filehandler.aspx?ddocname=en562310, ComponentLink2Description="2_Product page", ComponentLink2URL=https://www.microchip.com/en-us/product/USB2513B, ComponentLink3Description=3_X-information, ComponentLink4Description=4_X-information, Creation date=20211026, Design Item ID=USB2514Bi_M2, Dimensions WxLxH=6x6x1, HasBeenBuilt=SleeveIO_01, Part Number=USB2514Bi/M2, Sort order=501, Source=IC_UN1Q.SchLib, System=IC
U? U?: library part CMP-001-001414-1, "TPM", Manufacturer="NXP USA Inc.", Operating temperature range="-40°C .... +105°C", Package=HX2QFN20, Component Type="Integrated Circuit", ComponentLink1Description=1_Datasheet, ComponentLink1URL=https://www.nxp.com/part/SE050E2HQ1, ComponentLink2Description="2_Product page", ComponentLink2URL=https://www.nxp.com/products/security-and-authentication/authentication/edgelock-se050-plug-trust-secure-element-family-enhanced-iot-security-with-high-flexibility:SE050, ComponentLink3Description=3_X-information, ComponentLink3URL=https://www.nxp.com/docs/en/package-information/SOT1969-1.pdf, ComponentLink4Description=4_X-information, ComponentLink4URL=https://www.nxp.com/products/SE050, Creation date=20250528, Dimensions WxLxH="3 x 3 x  0.33mm", Manufacturer Part Number=SE050E2HQ1/Z01Z3Z, Part Number=SE050E2HQ1/Z01Z3Z, Sort order=501, System=IC
X? X?: library part CMP-001-000218-15, "Micro-HDMI connector, surface mount", Manufacturer=Molex, Manufacturer Part Number=46765-0001, ClassName=BIG, Component Type="Interface Connector", ComponentLink1Description=1_Datasheet, ComponentLink1URL=https://www.molex.com/molex/products/part-detail/io_connectors/0467650001, ComponentLink2Description="2_Product page", ComponentLink3Description=3_X-information, ComponentLink4Description=4_X-information, Creation date=20191231, Design Item ID=Molex_uHDMI_46765-0001, Dimensions WxLxH=6.5x7.7x2.9, ECCN=EAR99, Part Number=46765-0001, RoHS="RoHS 3", Sort order=111, Source=Conn_UN1Q.SchLib, System=Connector
X? X?: library part CMP-001-001437-1, "TE PCIe connector, 52 pins, height 4 mm", Manufacturer=TE, Manufacturer Part Number=1775862-2, Operating temperature range="-55 ... +85 C", ClassName=BIG, Component Type="Interface Connector", ComponentLink1Description=1_Datasheet, ComponentLink1URL=https://www.te.com/commerce/DocumentDelivery/DDEController?Action=srchrtrv&DocNm=8-1773459-7_EXPRESS_MINI_CARD_QRG&DocType=Data%20Sheet&DocLang=English&DocFormat=pdf&PartCntxt=1775862-2, ComponentLink2Description="2_Product page", ComponentLink2URL=https://www.te.com/en/product-1775862-2.html, ComponentLink3Description=3_X-information, ComponentLink4Description=4_X-information, Creation date=20250617, Dimensions WxLxH="5.56 x 29.9 x 5.2mm", ECCN=EAR99, Part Number=1775862-2, RoHS="RoHS 2", Sort order=111, System=Connector
X? X?: library part CMP-001-000097-10, "JST GH Connector, Header, 9 pin, Horizontal, Pitch 1.25 mm", Manufacturer=JST, Manufacturer Part Number=SM09B-GHS-TB(LF)(SN), Operating temperature range="-25 ... +85 °C", Part Number=SM09B-GHS-TB, ClassName=BIG, Component Type=Connector, ComponentLink1Description=1_Datasheet, ComponentLink1URL=https://www.jst-mfg.com/product/pdf/eng/eGH.pdf, ComponentLink2Description="2_Product page", ComponentLink3Description=3_X-information, ComponentLink4Description=4_X-information, Creation date=20210708, Design Item ID=GH-Connector_SM09B-GHS-TB, Dimensions WxLxH=4.05x14.5x4.25, HasBeenBuilt=False, Sort order=111, Source=Conn_UN1Q.SchLib, System=Connector
Y? Y? Y? Y?: library part CMP-001-001243-5, "Crystal 24 MHz ±10ppm 9pF 40Ohms 4-SMD", Manufacturer=EPSON, Manufacturer Part Number="TSX-3225 24.0000MF20G-AC3", Operating temperature range="-40 ... +105C", Tolerance=+/-10ppm, Component Type="Crystal & Oscillator", ComponentLink1Description=1_Datasheet, ComponentLink1URL=https://support.epson.biz/td/api/doc_check.php?dl=brief_TSX-3225&lang=en, ComponentLink2Description="2_Product page", ComponentLink3Description=3_X-information, ComponentLink4Description=4_X-information, Creation date=20240430, Dimensions WxLxH="3.2 x 2.5 x 0.6mm", Part Number="TSX-3225 24.0000MF20G-AC3", Sort order=455, System=Discrete
Y? Y? Y? Y? Y? Y?: library part CMP-001-000909-8, "Crystal 25MHz ±10ppm, 10pF", Manufacturer="ECS Inc.", Manufacturer Part Number=ECS-250-10-37B-CTN-TR, Operating temperature range="-40 ... +85C", Part Number=ECS-250-10-37B-CTN, Tolerance=+/-10ppm, Component Type="Crystal & Oscillator", ComponentLink1Description=1_Datasheet, ComponentLink1URL=https://ecsxtal.com/store/pdf/ECX-1637B.pdf, ComponentLink2Description=2_Product_page, ComponentLink2URL=https://ecsxtal.com/products/crystals/surface-mount-crystals/ecx-1637b/, ComponentLink3Description=3_X-information, ComponentLink4Description=4_X-information, Creation date=20230102, Dimensions WxLxH="2 x 1.6mm x 0.65mm", ECCN=EAR99, HasBeenBuilt=Cmod2_01, RoHS=RoHS3, Sort order=455, Source=UUDET_KOMPONENTIT.SchLib, System=Discrete
Y? Y?: library part CMP-001-001278-2, "PCIe Clock Generator, 2-output PCIE GEN 1–4 CLOCK GENERATOR", Manufacturer="Renesas Electronics Corporation", Operating temperature range="-40 .... +85 °C", Package=VFQFPN-24, ClassName=BIG, Component Type=Timing, ComponentLink1Description=1_Datasheet, ComponentLink1URL=https://www.renesas.com/us/en/document/dst/9fgv0241-datasheet, ComponentLink2Description="2_Product page", ComponentLink3Description=3_X-information, ComponentLink4Description=4_X-information, Creation date=20240816, Design Item ID=9FGV0241AKILF, Dimensions WxLxH=4.0x4.0x0.9mm, ECCN=EAR99, Manufacturer Part Number=9FGV0241AKILF, Part Number=9FGV0241AKILF, Sort order=455, System=IC

## Nets (pads, with @x,y where several pads share a name; then routed paths per layer and width w, separated by ;. In a path a pad name is that pad's centre, name@x,y a point inside that pad or via, vN(x,y) a via of type N, cw(c..) or ccw(c..) an arc to the next point about the centre after c; other vN are vias at no path point)
1V8_OUT_RBC: C?.1@20934.25,7205 C?.1@21523.5,7205 C?.1@21703.5,7205 C?.1@21878.5,7205 C?.1@22058.5,7205 C?.1@22249.25,7205 L?.1@23092.28,7205 PTP?.1@22450,7285 R?.2@21335,7236.42 U?.9@27675.08,7245.94 U?.18@27917.64,7198.27 U?.19@27927.54,7255.79
1V8_PER: C?.2@11905,4581.42 C?.2@12875,4581.42 C?.2@21170.75,7205 L?.1@11785,10508.58 L?.1@11785,11188.58 L?.2@23127.72,7205 PTP?.1@22770,7285 R?.2@7910,10531.42 R?.2@8110,10531.42 R?.2@8315,10531.42 R?.2@8705,11211.42 R?.2@8905,11211.42 R?.2@9110,11211.42 R?.2@11505,4581.42 R?.2@11705,4581.42 U?.1@11115.55,4584.53 U?.B4@12539.68,4594.69
3V3_ETH1_VDD: C?.2@14902.72,1020 C?.2@16055,1036.42 L?.2@15885,1036.42 R?.2@18240,1036.42 R?.2@18415,1036.42 U?.29@17656.46,1170.12
3V3_ETH1_VDDA: C?.2@16942.72,1020 C?.2@17730,1036.42 C?.2@17900,1036.42 L?.2@18070,1036.42 U?.11@17489.13,1018.54 U?.40@17489.13,1211.46
3V3_ETH2_VDD: C?.2@9142.72,1020 C?.2@10295,1036.42 L?.2@10125,1036.42 R?.2@12480,1036.42 R?.2@12650,1036.42 U?.29@11896.46,1170.12
3V3_ETH2_VDDA: C?.2@11182.72,1020 C?.2@11970,1036.42 C?.2@12140,1036.42 L?.2@12310,1036.42 U?.11@11729.13,1018.54 U?.40@11729.13,1211.46
3V3_OUT: C117.1 C118.1 C119.1 C120.1 C121.1 C123.1 L12.1 PTP35.1 R14.1 U4.9 U4.18 U4.19
3V3_SMPS: C122.2 C?.2@8930,1036.42 C?.2@11355,9856.42 C?.2@14695,1036.42 L12.2 L?.1@10125,1013.58 L?.1@11935,9833.58 L?.1@12310,1013.58 L?.1@15885,1013.58 L?.1@18070,1013.58 L?.2@8150,7621.42 PTP34.1
3V3_USBHUB: C?.1@12340,9833.58 C?.1@12540,9833.58 C?.1@12740,9833.58 C?.1@12945,9833.58 C?.1@13145,9833.58 C?.1@13345,9833.58 C?.2@13582.72,9825 C?.2@13787.72,9825 L?.2@11935,9856.42 U?.5@11017.8,9920 U?.10@11051.26,9807.8 U?.15@11149.68,9807.8 U?.23@11242.2,9920 U?.27@11242.2,9998.74 U?.29@11189.06,10032.2 U?.36@11051.26,10032.2
5V0_OUT: C100.1 C101.1 C102.1 C103.1 C104.1 C116.1 L9.1 PTP28.1 R10.2 U4.3 U4.20 U4.21
5V0_OUT_RBC: C?.1@24654.25,7205 C?.1@26778.5,7205 C?.1@26953.5,7205 C?.1@27133.5,7205 C?.1@27308.5,7205 C?.1@27499.25,7205 L?.1@28687.28,7205 PTP?.1@28045,7285 R?.2@26585,7236.42 U?.3@27675.08,7364.06 U?.20@27927.54,7354.21 U?.21@27917.64,7411.73
5V0_SMPS: C105.2 J?.11@9754.37,8165 J?.11@12169.37,8165 L7.1 L9.2 PTP26.1
5V0_SMPS_RBC: C?.1@7500,10508.58 C?.1@8505,11188.58 C?.2@26215.75,7205 L?.1@9315,1423.58 L?.2@28722.72,7205 PTP?.1@28365,7285 R?.1@9627.28,9825 R?.1@9827.28,9825 R?.1@13767.28,10500 R?.1@14407.28,11180 R?.2@8515,10531.42
**LAN2_TXRXA_N: T?.4@9375.75,7609.33 X?.7@9907.17,7983.43
**LAN2_TXRXA_P: T?.5@9391.5,7609.33 X?.8@9907.17,8032.64
**LAN2_TXRXB_N: T?.4@10205.75,7609.33 X?.3@9907.17,7786.57
**LAN2_TXRXB_P: T?.5@10221.5,7609.33 X?.6@9907.17,7934.21
**LAN2_TXRXC_N: T?.1@9328.5,7609.33 X?.4@9907.17,7835.79
**LAN2_TXRXC_P: T?.2@9344.25,7609.33 X?.5@9907.17,7885
**LAN2_TXRXD_N: T?.1@10158.5,7609.33 X?.1@9907.17,7688.15
**LAN2_TXRXD_P: T?.2@10174.25,7609.33 X?.2@9907.17,7737.36
*LAN1_TXRXA_N: C?.2@14525,1036.42 J.11@11620,7765
*LAN1_TXRXA_P: C?.2@15035,1036.42 J.10@11540,7765
*LAN1_TXRXB_N: C?.2@14185,1036.42 J.4@11500,7865
*LAN1_TXRXB_P: C?.2@14355,1036.42 J.5@11580,7865
*LAN1_TXRXC_N: C?.2@13845,1036.42 J.3@11420,7865
*LAN1_TXRXC_P: C?.2@14015,1036.42 J.2@11340,7865
*LAN1_TXRXD_N: C?.2@13500,1036.42 J.8@11300,7765
*LAN1_TXRXD_P: C?.2@13670,1036.42 J.9@11380,7765
*LAN2_TXRXA_N: C?.2@8760,1036.42 T?.7@9375.75,7650.67
*LAN2_TXRXA_P: C?.2@9275,1036.42 T?.6@9391.5,7650.67
*LAN2_TXRXB_N: C?.2@8420,1036.42 T?.7@10205.75,7650.67
*LAN2_TXRXB_P: C?.2@8590,1036.42 T?.6@10221.5,7650.67
*LAN2_TXRXC_N: C?.2@8080,1036.42 T?.10@9328.5,7650.67
*LAN2_TXRXC_P: C?.2@8250,1036.42 T?.9@9344.25,7650.67
*LAN2_TXRXD_N: C?.2@7740,1036.42 T?.10@10158.5,7650.67
*LAN2_TXRXD_P: C?.2@7910,1036.42 T?.9@10174.25,7650.67
*mPCIe_CON_CLK_N: ?.2@16460,4875.83 T?.2@18741.81,4829.84 X?.11@19807.91,4848.58
*mPCIe_CON_CLK_P: 1?.2@16240.83,4840 T?.3@18741.81,4810.16 X?.13@19839.41,4848.58
*mPCIe_RX_N: ?.2@16815,4875.83 T?.2@18046.81,4829.84 X?.23@20122.87,4848.58
*mPCIe_RX_P: ?.2@16635,4875.83 T?.3@18046.81,4810.16 X?.25@20154.37,4848.58
*mPCIe_TX_N: ?.2@17170,4875.83 C?.2@16010,4831.42 X?.31@20248.86,4848.58
*mPCIe_TX_P: ?.2@16990,4875.83 C?.2@14660,4831.42 X?.33@20280.35,4848.58
*PER1_TX1_N: C?.1@10790,10508.58 D?.5@9949.37,10488.58 J?.A3@11988.56,10591.1
*PER1_TX1_P: C?.1@10995,10508.58 D?.4@9929.68,10488.58 J?.A2@11988.56,10571.42